# EAGLE board schema (EAGLE 9.5.0)
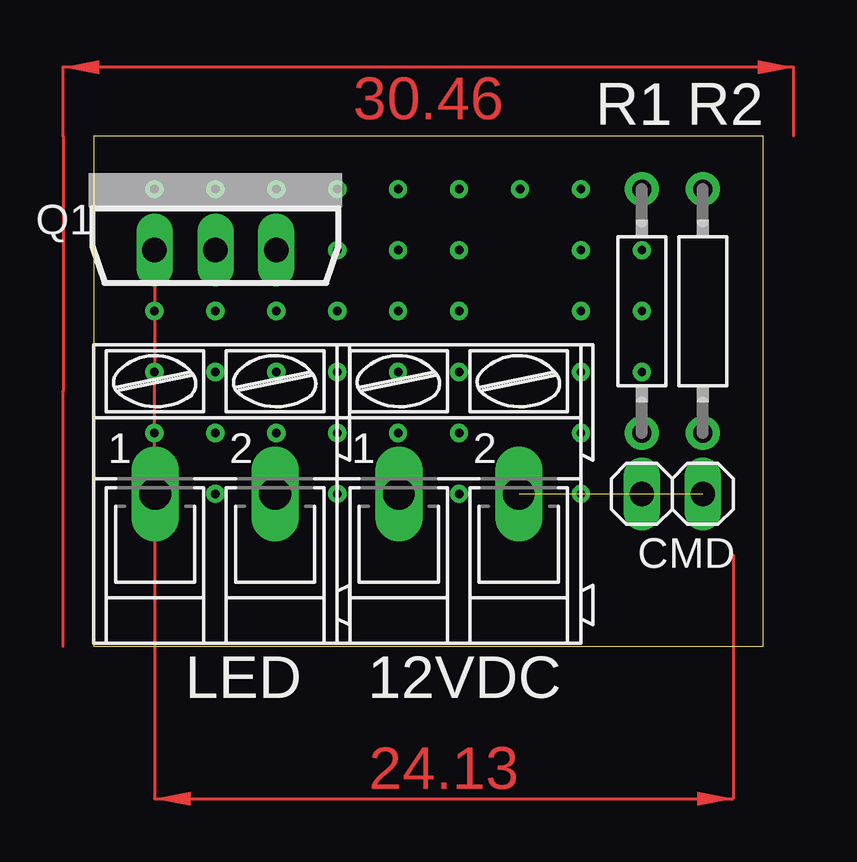
[diagram p0: board, top side]
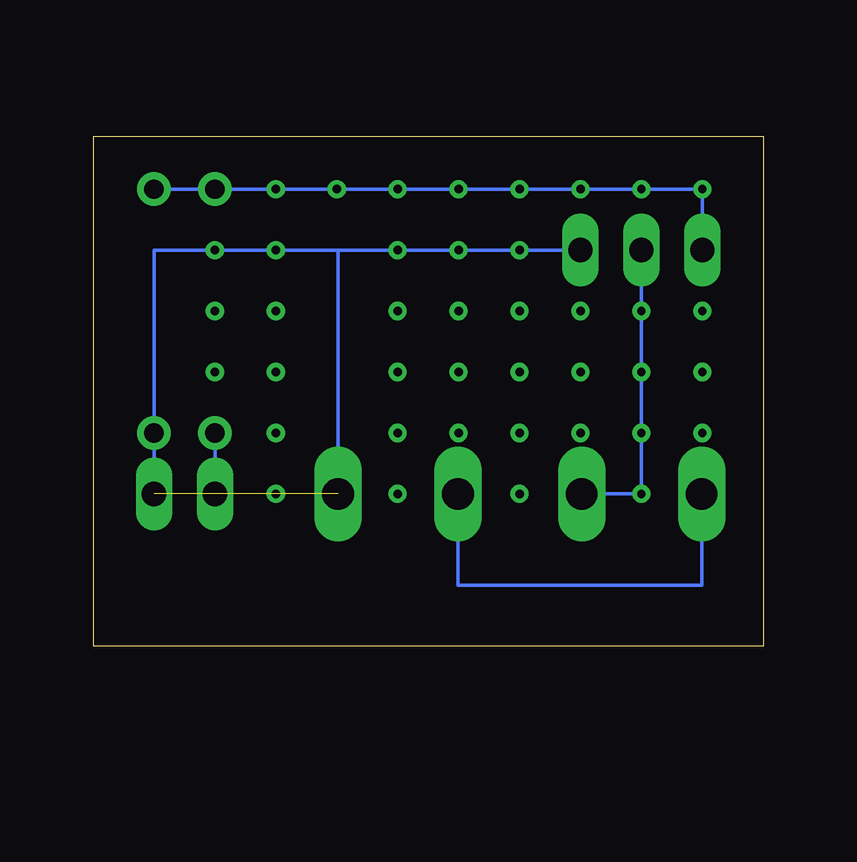
[diagram p1: board, bottom side, seen from below]

Size 27.92 x 21.26 mm. Coordinates in mm from the lower left corner, seen from the top.
Outline: 0,0 27.92,0 27.92,21.26 0,21.26 0,0
Copper layers (1*16): Top 0.035mm / dielectric 1.5mm / Bottom 0.035mm
Design rules "default": minimum track width 6mil, minimum drill 0.35mm, track to track 6mil, track to pad 6mil, pad to pad 6mil, via to via 6mil, smd to smd 6mil, copper to edge 40mil, drill to drill 6mil, minimum pad ring 10mil, minimum via ring 8mil, stop-mask expansion 4mil, vias tented up to drill 0mil, thermal gap 10mil

## Footprints (pad centres in the part's own frame; a part is rotated, then mirrored left to right if it is on the bottom)
AK300/2 = drill 1.321 long: 1 -2.515,0; 2 2.489,0
1X02 = drill 1.016 long: 1 -1.27,0; 2 1.27,0
TO262-V = drill 1.016 long: 1 -2.54,0; 2 0,0; 3 2.54,0
RS1/4 = drill 0.8 pad 1.4: 1 -5.08,0; 2 5.08,0

## Placement (x,y rotation side)
12VDC  [AK300/2]  15.24,6.35 0 top
CMD  [1X02]  24.13,6.35 180 top
LED  [AK300/2]  5.08,6.35 0 top
Q1  IRL540N  [TO262-V]  5.08,16.51 0 top
R1  270  [RS1/4]  22.86,13.97 90 top
R2  10k  [RS1/4]  25.4,13.97 90 top

## Library data of the parts
12VDC LED = con-ptr500; OC_FARNELL: unknown; OC_NEWARK: unknown
CMD = pinhead
Q1 = transistor-power
R1 R2 = resistor-power; MF: OHMITE; MPN: RRS1K0; OC_FARNELL: unknown; OC_NEWARK: 01F7661

## Nets
GND: 12VDC.2 CMD.1 Q1.3 R2.1
N$1: CMD.2 R1.1
N$2: Q1.1 R1.2 R2.2
N$4: 12VDC.1 LED.1
N$5: LED.2 Q1.2

## Tracks (layer width: path | path; a pad name or v marks a point on that pad's centre or on a via)
GND  (via drill 0.35)  (1 unrouted)
  Bottom 0.152: R2.1 CMD.1 | Q1.3 v10.16,16.51 v12.7,16.51 v15.24,16.51 17.73,16.51 12VDC.2
N$1
  Bottom 0.152: R1.1 CMD.2
N$2  (via drill 0.35)
  Bottom 0.152: Q1.1 v2.54,19.05 v5.08,19.05 v7.62,19.05 v10.16,19.05 v12.7,19.05 v15.24,19.05 v17.78,19.05 v20.32,19.05 R1.2 R2.2
N$4
  Bottom 0.152: LED.1 2.56,2.54 12.72,2.54 12VDC.1
N$5  (via drill 0.35)
  Bottom 0.152: LED.2 v5.08,6.35 v5.08,8.89 v5.08,11.43 v5.08,13.97 Q1.2
N$7  (via drill 0.35)
  other vias: 2.54,13.97
N$8  (via drill 0.35)
  other vias: 2.54,11.43
N$9  (via drill 0.35)
  other vias: 2.54,8.89
N$10  (via drill 0.35)
  other vias: 7.62,8.89
N$11  (via drill 0.35)
  other vias: 10.16,8.89
N$12  (via drill 0.35)
  other vias: 12.7,8.89
N$13  (via drill 0.35)
  other vias: 15.24,8.89
N$15  (via drill 0.35)
  other vias: 20.32,8.89
N$16  (via drill 0.35)
  other vias: 12.7,11.43
N$17  (via drill 0.35)
  other vias: 10.16,11.43
N$18  (via drill 0.35)
  other vias: 10.16,13.97
N$19  (via drill 0.35)
  other vias: 7.62,13.97
N$20  (via drill 0.35)
  other vias: 7.62,11.43
N$21  (via drill 0.35)
  other vias: 20.32,6.35
N$22  (via drill 0.35)
  other vias: 15.24,11.43
N$24  (via drill 0.35)
  other vias: 20.32,11.43
N$25  (via drill 0.35)
  other vias: 20.32,13.97
N$26  (via drill 0.35)
  other vias: 20.32,16.51
N$27
  Bottom 0.152: 17.78,16.51 25.4,16.51 25.4,8.89
N$29  (via drill 0.35)
  other vias: 15.24,13.97
N$30  (via drill 0.35)
  other vias: 12.7,13.97
N$31  (via drill 0.35)
  other vias: 10.16,6.35
N$32  (via drill 0.35)
  other vias: 15.24,6.35
N$47  (via drill 0.35)
  other vias: 22.86,16.51
N$50  (via drill 0.35)
  other vias: 22.86,13.97
N$51  (via drill 0.35)
  other vias: 22.86,11.43
(copper drawn outside any net)
  shapes: Top area x4